# Altium PCB Pwr_Brd_4_PCB.PcbDoc
Units mil, origin at the board's own origin, x right, y up, seen from the top; angles counter-clockwise.
Board outline 4090 x 4010 mil, 2 copper layers (Top Layer, Bottom Layer), stack 61.756 mil thick; 54 components, 18 nets, 126 pads, 22 vias.
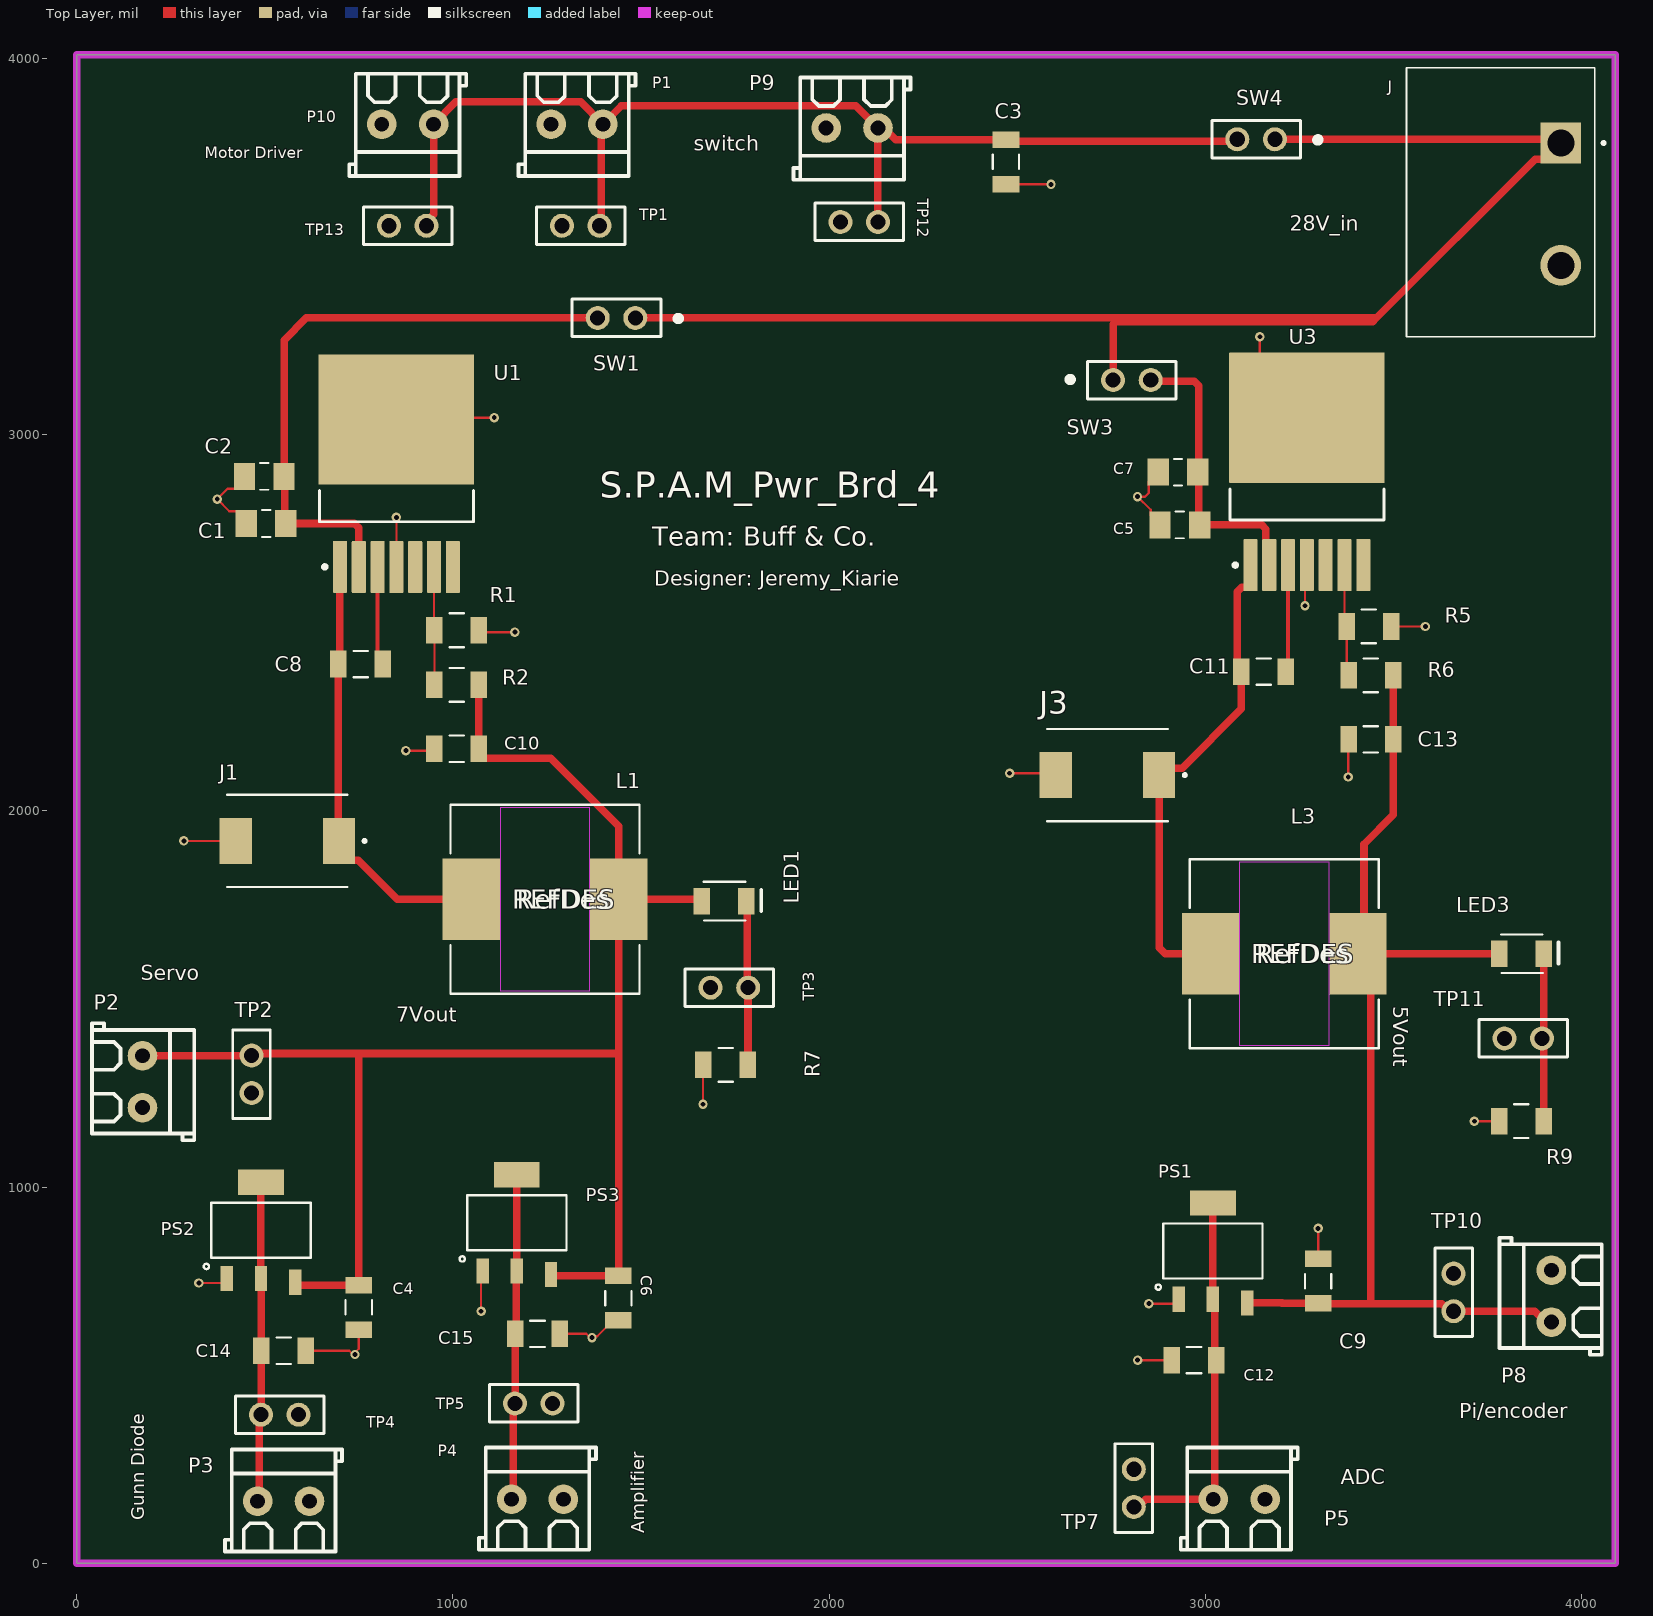
[diagram p0: Top Layer view]
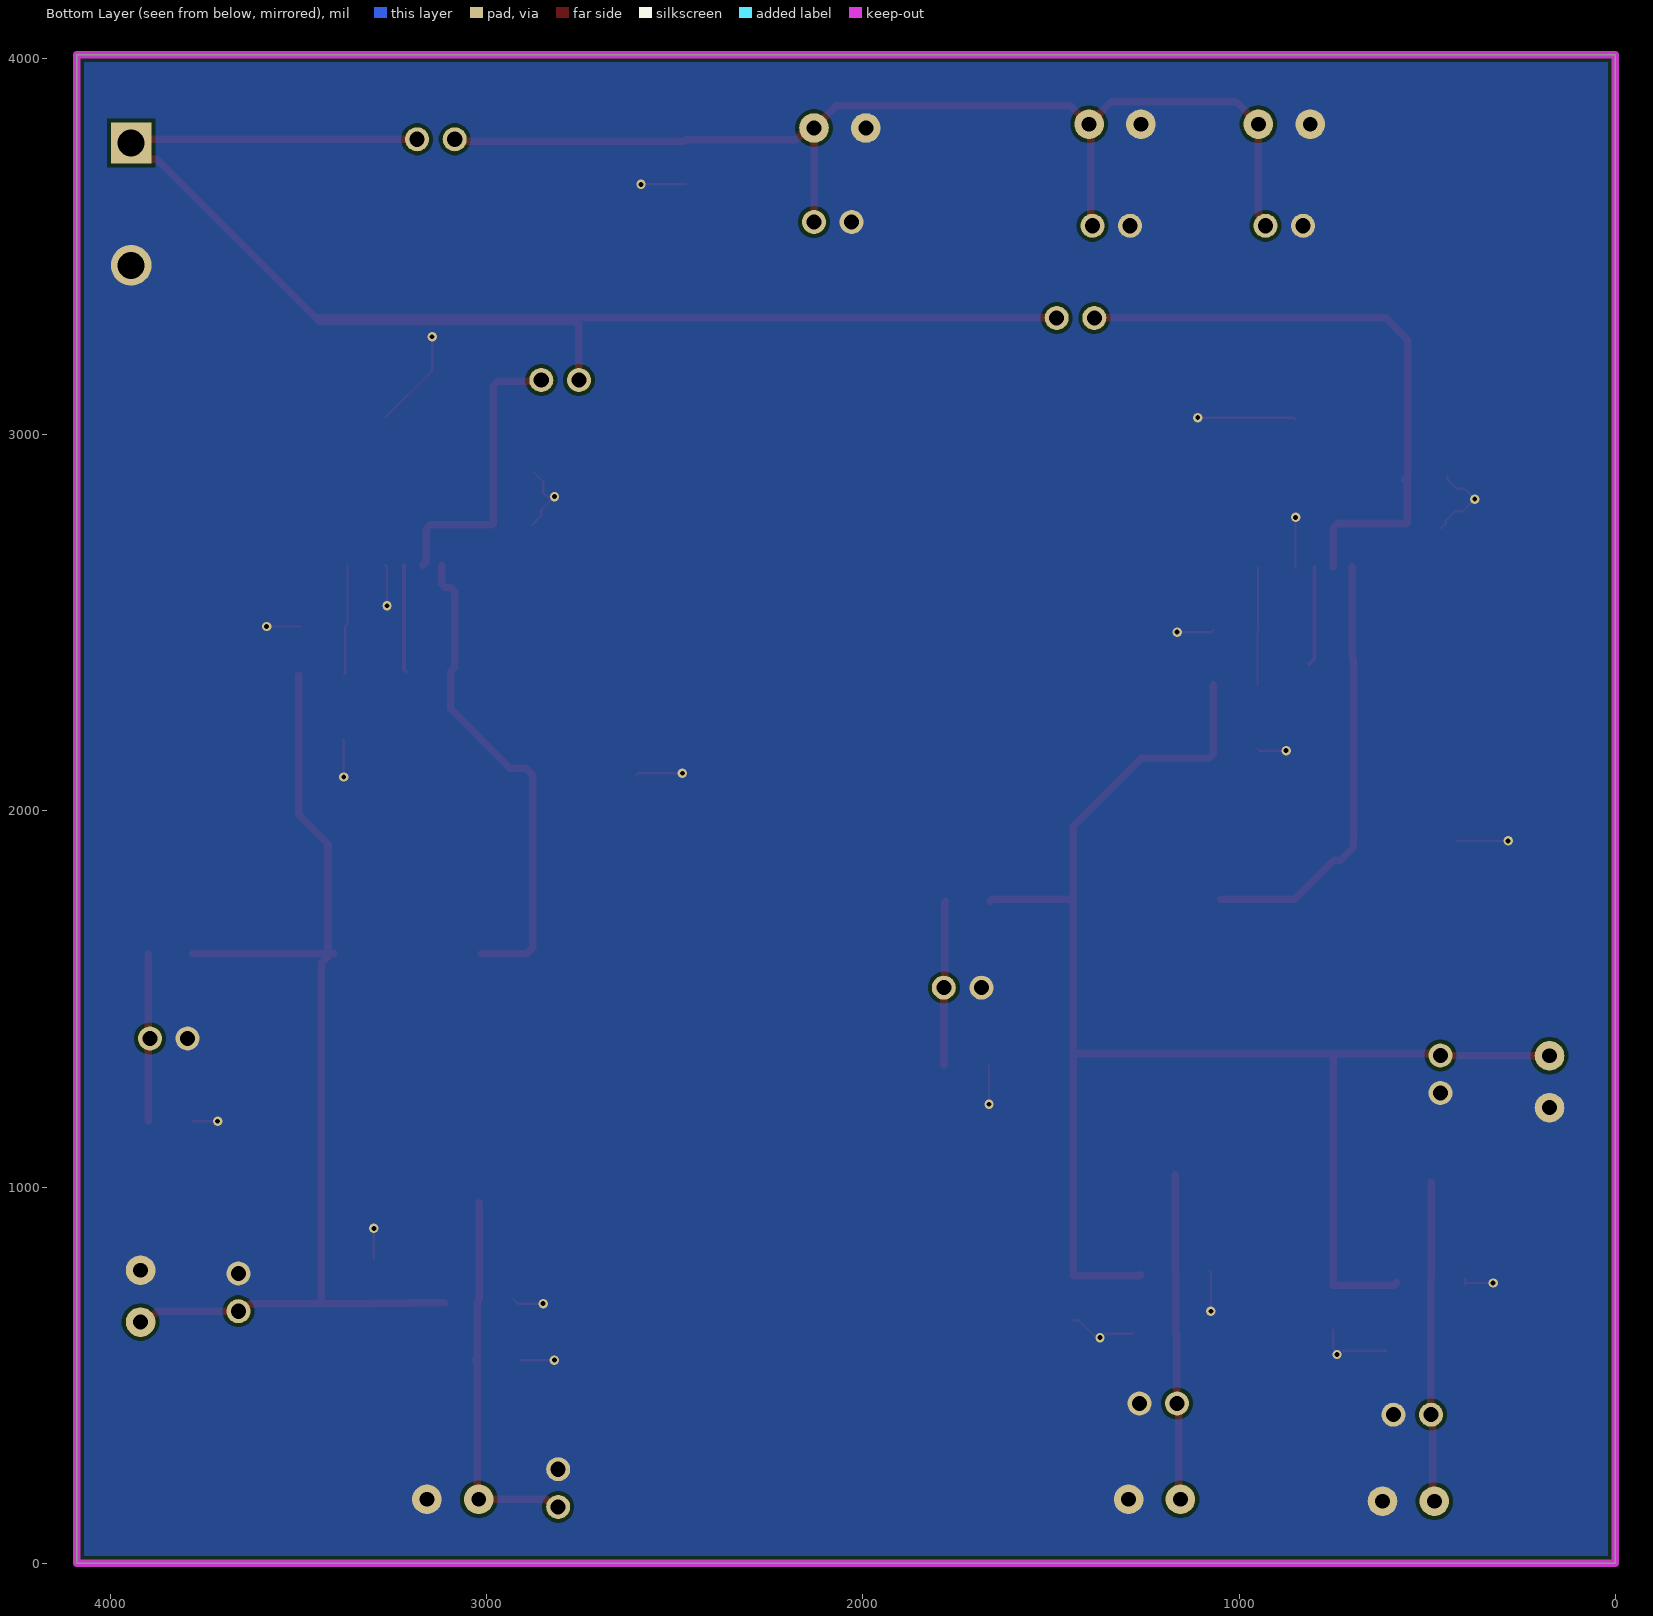
[diagram p1: Bottom Layer view, seen from below]
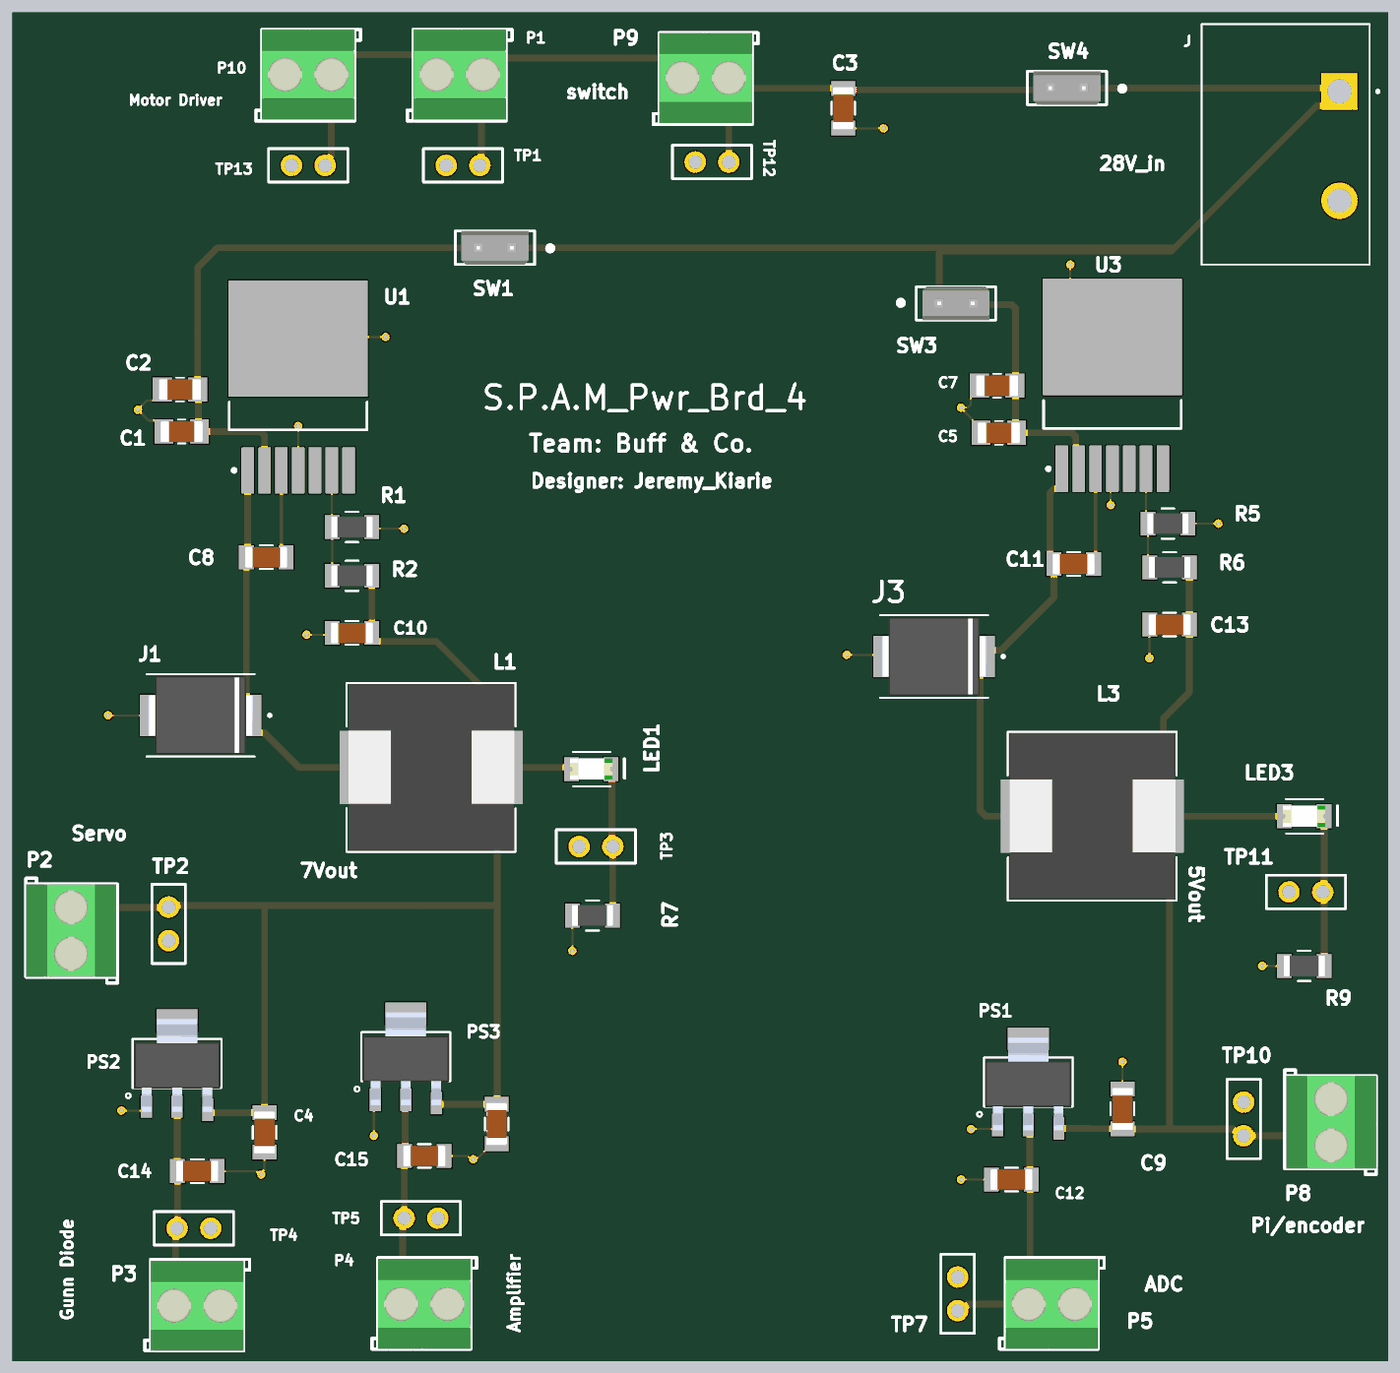
[diagram p2: 3D render of the assembled board from above, using the file's embedded part models]

## Layer stack, top to bottom
Top Solder: solder mask 1, SM-001, Dk 4
Top Layer: signal copper 1.378
Dielectric 1: core 59, Core-043, Dk 4.3
Bottom Layer: signal copper 1.378
Bottom Solder: solder mask 1, SM-001, Dk 4

## Board outline
0,0 4090,0 4090,4010 0,4010

## Design rules (kind name [scope] priority, off if disabled: settings)
Clearance [All] p1: gap=10 ignorepadtopadclearanceinfootprint=FALSE
PlaneClearance [All] p1: clearance=10
PlaneConnect [All] p1: planeconnectstyle=Direct reliefexpansion=20 reliefentries=4 reliefconductorwidth=10 reliefairgap=10
PolygonConnect [All] p1: connectstyle=Direct reliefconductorwidth=10 reliefentries=4 polygonreliefangle="90 Angle" airgapwidth=10
RoutingVias [All] p1: holewidth=13 width=25 viastyle="Through Hole" minholewidth=13 minwidth=25 maxholewidth=60 maxwidth=80
SolderMaskExpansion [All] p1: expansion=4 istentingtop=FALSE
SupplyNets "Schematic Supply Nets" [InNet('GND')] p1: voltage=0.000
UnRoutedNet [All] p1: checkbadconnections=TRUE
Width "Schematic Width Constraint_19" [InNet('NetC4_2')] p1: maxlimit=100 minlimit=10 preferedwidth=20 minimp=50.000000 maximp=50.000000 favimp=50.000000
Width "Schematic Width Constraint_18" [InNet('NetC9_2')] p2: maxlimit=100 minlimit=10 preferedwidth=20 minimp=50.000000 maximp=50.000000 favimp=50.000000
Width "Schematic Width Constraint_17" [InNet('+28V')] p3: maxlimit=100 minlimit=10 preferedwidth=20 minimp=50.000000 maximp=50.000000 favimp=50.000000
Width "Schematic Width Constraint_16" [InNet('NetC12_2')] p4: maxlimit=100 minlimit=10 preferedwidth=20 minimp=50.000000 maximp=50.000000 favimp=50.000000
Width "Schematic Width Constraint_15" [InNet('NetC14_2')] p5: maxlimit=100 minlimit=10 preferedwidth=20 minimp=50.000000 maximp=50.000000 favimp=50.000000
Width "Schematic Width Constraint_14" [InNet('NetC15_2')] p6: maxlimit=100 minlimit=10 preferedwidth=20 minimp=50.000000 maximp=50.000000 favimp=50.000000
Width "Schematic Width Constraint_13" [InNet('NetLED1_2')] p7: maxlimit=100 minlimit=10 preferedwidth=20 minimp=50.000000 maximp=50.000000 favimp=50.000000
Width "Schematic Width Constraint_12" [InNet('NetLED3_2')] p8: maxlimit=100 minlimit=10 preferedwidth=20 minimp=50.000000 maximp=50.000000 favimp=50.000000
Width "Schematic Width Constraint_10" [InNet('NetC11_1')] p9: maxlimit=100 minlimit=10 preferedwidth=20 minimp=50.000000 maximp=50.000000 favimp=50.000000
Width "Schematic Width Constraint_9" [InNet('NetC8_1')] p10: maxlimit=100 minlimit=10 preferedwidth=20 minimp=50.000000 maximp=50.000000 favimp=50.000000
Width "Schematic Width Constraint" [InNet('NetC3_1')] p11: maxlimit=100 minlimit=10 preferedwidth=20 minimp=50.000000 maximp=50.000000 favimp=50.000000
Width "Schematic Width Constraint_2" [InNet('NetC5_2')] p12: maxlimit=100 minlimit=10 preferedwidth=20 minimp=50.000000 maximp=50.000000 favimp=50.000000
Width "Schematic Width Constraint_1" [InNet('NetC1_2')] p13: maxlimit=100 minlimit=10 preferedwidth=20 minimp=50.000000 maximp=50.000000 favimp=50.000000
Width [All] p14: maxlimit=10 minlimit=6 preferedwidth=6 minimp=50.000000 maximp=50.000000 favimp=50.000000
27 further rules are at their usual default settings.

## Components (designator, comment, footprint, x,y, rotation, side; value= is the part's Value field where it differs from the comment)
C1 "C3216X5R1E336M160AC" CAPC3216X180N 503.7,2763.7 r0 top
C2 "C3216X5R1E336M160AC" CAPC3216X180N 498.7,2888.7 r0 top
C3 "22uF" 1206_Passive_Capacitor 2470,3725 r270 top
C4 "10uF" 1206_Passive_Capacitor 750,680 r90 top
C5 "C3216X5R1E336M160AC" CAPC3216X180N 2932.4,2760 r0 top
C6 "10uF" 1206_Passive_Capacitor 1440,705 r90 top
C7 "C3216X5R1E336M160AC" CAPC3216X180N 2927.4,2900 r0 top
C8 "10nF" 1206_Passive_Capacitor 755,2390 r0 top
C9 "10uF" 1206_Passive_Capacitor 3300,750 r270 top
C10 "22uF" 1206_Passive_Capacitor 1010,2165 r0 top
C11 "10nF" 1206_Passive_Capacitor 3155,2370 r0 top
C12 "22uF" 1206_Passive_Capacitor 2970,540 r0 top
C13 "22uF" 1206_Passive_Capacitor 3440,2190 r0 top
C14 "22uF" 1206_Passive_Capacitor 550,565 r180 top
C15 "22uF" 1206_Passive_Capacitor 1225,610 r180 top
J "4DB-P108-02" TE_2-1437667-4 3945,3775 r270 top
J1 "SL44-E3/57T" DIOM7959X262N 560,1920 r180 top
J3 "SL44-E3/57T" DIOM7959X262N 2740,2095 r180 top
L1 "DR127-220-R" DR127 1245,1765 r0 top
L3 "DR127-220-R" DR127 3210,1620 r0 top
LED1 "Red" LED_1206 1721,1760 r0 top
LED3 "Red" LED_1206 3840,1620 r0 top
P1 "2P Screw Terminal Block" "P_Terminal block 3.5mm-pitch" 1330,3825 r180 top
P2 "2P Screw Terminal Block" "P_Terminal block 3.5mm-pitch" 175,1280 r270 top
P3 "2P Screw Terminal Block" "P_Terminal block 3.5mm-pitch" 550,165 r0 top
P4 "2P Screw Terminal Block" "P_Terminal block 3.5mm-pitch" 1225,170 r0 top
P5 "2P Screw Terminal Block" "P_Terminal block 3.5mm-pitch" 3090,170 r0 top
P8 "2P Screw Terminal Block" "P_Terminal block 3.5mm-pitch" 3920,710 r90 top
P9 "2P Screw Terminal Block" "P_Terminal block 3.5mm-pitch" 2061.1,3815 r180 top
P10 "2P Screw Terminal Block" "P_Terminal block 3.5mm-pitch" 880,3825 r180 top
PS1 "AMS1117-3.3" LDO 3020,830 r0 top value="IC REG LINEAR 3.3V 800MA SOT223"
PS2 "AMS1117-5.0" LDO 490,885 r0 top value="IC REG LINEAR 5V 1A SOT223"
PS3 "AMS1117-5.0" LDO 1170,905 r0 top value="IC REG LINEAR 5V 1A SOT223"
R1 "1k" 1206_Passive_Resitor 1010,2480 r0 top value="1K Ohm"
R2 "1K" 1206_Passive_Resitor 1010,2335 r0 top value="4.75K Ohm"
R5 "1k" 1206_Passive_Resitor 3435,2490 r0 top value="1K Ohm"
R6 "1k" 1206_Passive_Resitor 3440,2360 r0 top value="3.16K Ohm"
R7 "1k" 1206_Passive_Resitor 1725,1325 r180 top value="1K Ohm"
R9 "1k" 1206_Passive_Resitor 3840,1175 r180 top value="1K Ohm"
SW1 "SW_2Pin_100mil_Switch" 2Pin-Header-Conn 1485,3310 r180 top
SW3 "SW_2Pin_100mil_Switch" 2Pin-Header-Conn 2755,3145 r0 top
SW4 "SW_2Pin_100mil_Switch" 2Pin-Header-Conn 3185,3785 r180 top
TP1 "10x Probe TP" TP_Diff_Probe 1390,3555 r180 top
TP2 "10x Probe TP" TP_Diff_Probe 465,1350 r270 top
TP3 "10x Probe TP" TP_Diff_Probe 1785,1530 r180 top
TP4 "10x Probe TP" TP_Diff_Probe 490,395 r0 top
TP5 "10x Probe TP" TP_Diff_Probe 1165,425 r0 top
TP7 "10x Probe TP" TP_Diff_Probe 2810,150 r90 top
TP10 "10x Probe TP" TP_Diff_Probe 3660,670 r90 top
TP11 "10x Probe TP" TP_Diff_Probe 3895,1395 r180 top
TP12 "10x Probe TP" TP_Diff_Probe 2130,3565 r180 top
TP13 "10x Probe TP" TP_Diff_Probe 930,3555 r180 top
U1 "LM2678S-ADJ/NOPB" KTW0007B_N 850,2896.3 r90 top
U3 "LM2678S-ADJ/NOPB" KTW0007B_N 3270,2901.3 r90 top

## Footprints (in the part's own frame and the unit in brackets; to place one, negate y for a bottom-side part, rotate by r counter-clockwise, add the part's x,y. Pads: shape width x height; smd on the part's side, far side on the other; paste and mask are expansions set on the pad)
2Pin-Header-Conn [mm]
  round 1.62 hole 1.02: 1(0,0) 2(2.54,0)
  silkscreen extent -3.03,-1.27 4.26,1.26, body extent -1.27,-1.27 3.81,1.27, height 8.13
1206_Passive_Capacitor [mil]
  rect 44x71 smd: 1(-59,0) 2(59,0)
  silkscreen extent -19,-35 19,35, body extent -63,-31 63,32, height 50
1206_Passive_Resitor [mil]
  rect 44x71 smd: 1(-59,0) 2(59,0)
  silkscreen extent -19,-45 19,45, body extent -61,-31 61,31, height 26
CAPC3216X180N [mm]
  rect 1.44x1.82 smd: 1(-1.336,0) 2(1.336,0)
  silkscreen extent -0.29,-0.9 0.29,0.9, body extent -1.6,-0.8 1.6,0.8, height 1.8
DIOM7959X262N [mm]
  rect 2.18x3.12 smd: A(3.485,0) C(-3.485,0)
  silkscreen extent -5.32,-3.11 4.07,3.11, body extent -3.97,-2.96 3.97,2.96, height 2.62
DR127 [mil]
  rect 152x217 smd paste+0 mask+0: 1(-196,0) 2(196,0)
  Top Layer keep-out region: -118,-244 -118,244 118,244 118,-244
  silkscreen extent -251,-251 251,251, body extent -245,-245 247,247, height 315
KTW0007B_N [mm] "DPAK, 7-Leads, Body 9.4x10.4mm, Pitch 1.27mm, IPC Medium Density"
  rrect11% 3.5x0.95 smd: 1(-6.3,3.81) 2(-6.3,2.54) 3(-6.3,1.27) 4(-6.3,0) 5(-6.3,-1.27) 6(-6.3,-2.54) 7(-6.3,-3.81)
  rrect1% 8.8x10.5 smd: 8(3.65,0)
  silkscreen extent -6.42,-5.2 -1.15,5.2, body extent -3.25,-5.2 6.15,5.2, height 4.65
LDO [mm]
  rect 0.838x1.7 smd: 1(-2.311,-3.25) 2(0,-3.25) 3(2.311,-3.5)
  rect 3.099x1.7 smd: 4(0,3.25)
  silkscreen extent -3.86,-2.62 3.35,1.85, body extent -3.25,-3.65 3.25,3.35, height 1.85
LED_1206 [mil]
  rect 44x71 smd: 1(-59,0) 2(59,0)
  silkscreen extent -54,-51 99,51, body extent -63,-31 63,31, height 28
"P_Terminal block 3.5mm-pitch" [mm]
  round 2 hole 1: 1(-1.75,0) 2(1.75,0)
  silkscreen extent -3.95,-3.4 3.95,3.5, body extent -3.5,-3.4 3.5,3.4, height 8.4
TE_2-1437667-4 [mil]
  rect 108x108 hole 72: 1(0,0)
  round 108 hole 72: 2(325,0)
  silkscreen extent -200,-410 515,118
TP_Diff_Probe [mm]
  round 1.62 hole 1.02: 1(0,0) 2(2.54,0)
  silkscreen extent -1.72,-1.27 4.26,1.26

## Part data
C1 C2 C5 C7: "Cap Ceramic 33uF 25V X5R 20% Pad SMD 1206 85Â°C Low ESR T/R", Package="3216 TDK", Check_prices=https://www.snapeda.com/parts/C3216X5R1E336M160AC/TDK/view-part/?ref=eda, MF="TDK Electronics", MP=C3216X5R1E336M160AC, SnapEDA_Link=https://www.snapeda.com/parts/C3216X5R1E336M160AC/TDK/view-part/?ref=snap
C3 C10 C12 C13 C14 C15: library part C_22uF_1206, "22uF ±10% 25V X5R 1206 Multilayer Ceramic Capacitors MLCC - SMD/SMT RoHS", LCSC Part#=C12891, MFR Part #=CL31A226KAHNNNE, Datasheet=https://datasheet.lcsc.com/lcsc/1811031514_Samsung-Electro-Mechanics-CL31A226KAHNNNE_C12891.pdf, Type=basic
C4 C6 C9: library part C_10uF_1206, "10uF ±10% 50V X5R 1206 Multilayer Ceramic Capacitors MLCC - SMD/SMT RoHS", LCSC Part#=C13585, MFR Part #=CL31A106KBHNNNE, Datasheet=https://datasheet.lcsc.com/lcsc/1810221112_Samsung-Electro-Mechanics-CL31A106KBHNNNE_C13585.pdf, Type=Basic
C8 C11: library part C_10nF_1206, "10nF 50V X7R ±10% 1206 Multilayer Ceramic Capacitors MLCC - SMD/SMT ROHS", LCSC Part#=C1848, MFR Part #=CL31B105KBHNNNE, Digikey Link=https://www.digikey.com/product-detail/en/C1206C105M4RACTU/399-8150-1-ND/3471873/?itemSeq=304982366, Type=Basic
J: "Conn; Term Strip; Barrier; 2Pole; 8.26mmPitch; SnglRow; 22-12; Series 4DB; 20A; 150V", Package=None, Availability=Unavailable, MF="TE Connectivity", MP=4DB-P108-02, Price=None, SnapEDA_Link=https://www.snapeda.com/parts/4DB-P108-02/TE%20Connectivity%20AMP%20Connectors/view-part/2743721/?ref=snap, TE_purchase_URL=https://www.te.com/usa-en/product-2-1437667-4.html?te_bu=Cor&te_type=disp&te_campaign=seda_glo_cor-seda-global-disp-prtnr-fy19-seda-model-bom-cta_sma-317_1&elqCampaignId=32493
J1 J3: "Diode Schottky 40 V 4A Surface Mount DO-214AB (SMC)", Package="DO-214 Vishay", Check_prices=https://www.snapeda.com/parts/SL44-E3/57T/Vishay/view-part/?ref=eda, MF="Vishay Semiconductor", MP=SL44-E3/57T, SnapEDA_Link=https://www.snapeda.com/parts/SL44-E3/57T/Vishay/view-part/?ref=snap
L1 L3: "Description", Manufacturer_Name=Eaton, Copyright="Copyright (C) 2025 Ultra Librarian. All rights reserved.", Manufacturer_Part_Number=DR127-220-R
LED1 LED3: library part LED_RED_1206, "Red 621~631nm 1206 Light Emitting Diodes (LED) RoHS", LCSC Part#=C93133, MFR Part #=15-21/R6C-FQ1R1B/2T, Datasheet=https://datasheet.lcsc.com/szlcsc/1811151241_Everlight-Elec-15-21-R6C-FQ1R1B-2T_C93133.pdf, Type=Extended
P1 P2 P3 P4 P5 P8 P9 P10: library part "P_Terminal block", "Green Straight pin 3.5mm  pitch; P=3.5mm  Screw terminal ROHS", LCSC Part#=C474892, Manufacturer="Cixi Kefa Elec", MFR Part #=KF350-3.5-2P, Datasheet=https://datasheet.lcsc.com/lcsc/2001160007_Cixi-Kefa-Elec-KF350-3-5-2P_C474892.pdf
PS1: library part PS_AMS_LDO_3v3, "LOW DROPOUT REGULATORS(LDO) POSITIVE FIXED 1.3V @ 800MA 15V 3.3V 1A SOT-223 ROHS", LCSC Part#=C6186, MFR Part #=AMS1117-3.3, Type=Basic
PS2 PS3: library part PS_AMS_LDO_5V, "LOW DROPOUT REGULATORS(LDO) POSITIVE FIXED 1.3V @ 1A 15V 5V 1A SOT-223 ROHS", LCSC Part#=C6187, MFR Part #=AMS1117-5.0, Type=Basic
R1 R2 R5 R6 R7 R9: library part R_1K_1206, "CHIP RESISTOR - SURFACE MOUNT 1KOHMS ±1% 1/4W 1206 ROHS", LCSC Part#=C4410, MFR Part #=RNCP1206FTD1K00CT, Digikey Link=https://www.digikey.com/product-detail/en/RNCP1206FTD1K00/RNCP1206FTD1K00CT-ND/2240675/?itemSeq=304982373, Type=Basic
SW1 SW3 SW4: "2Pin Header", LCSC Part#=C124375, Type=Extended
TP1 TP2 TP3 TP4 TP5 TP7 TP10 TP11 TP12 TP13: library part TP_Diff_Probe, "Test Point 300 mil centers"
U1 U3: library part CMP-0069-00191-3, "SIMPLE SWITCHER® High Efficiency 5A Step-Down Voltage Regulator, 7-pin TO-263, Pb-Free", Manufacturer="Texas Instruments", PackageTopMarking=NSUZXYTTE#*LM2678*S-ADJ, PowerWise=N, Code_JEDEC=MO-169-AC, ComponentLink1Description="Datasheet URL", ComponentLink1URL=http://www.ti.com/general/docs/lit/getliterature.tsp?genericPartNumber=LM2678&fileType=pdf, CompType=Switcher, PackageDescription="TO-263, Molded, .400 x .390 x .180in Body, 7 Lead, .050in Pitch, Surface Mount", PackageReference=KTW0007B, PinCount=7, RoHS=Y

## Via types
v1: diameter 25, hole 13, Top Layer to Bottom Layer, 22 vias

## Nets (pads, with @x,y where several pads share a name; then routed paths per layer and width w, separated by ;. In a path a pad name is that pad's centre, name@x,y a point inside that pad or via, vN(x,y) a via of type N, cw(c..) or ccw(c..) an arc to the next point about the centre after c; other vN are vias at no path point)
+28V: J.1 SW1.1 SW3.1 SW4.1 | length 4285.9
  Top Layer w20: SW1.1 1545.32,3310 3455,3310 ; SW3.1 2755,3293.28 2761.72,3300 3445,3300 3455,3310 ; SW4.1 3935,3785 J.1 3920,3775 3920,3751.29 3901,3732.29 3877.29,3732.29 3455,3310
GND: C1.1 C2.1 C3.2 C4.1 C5.1 C6.1 C7.1 C9.1 C10.1 C12.1 C13.1 C14.1 C15.1 J1.A J3.A J.2 P1.2 P2.2 P3.2 P4.2 P5.2 P8.2 P9.2 P10.2 PS1.1 PS2.1 PS3.1 R1.2 R5.2 R7.2 R9.2 TP1.2 TP2.2 TP3.2 TP4.2 TP5.2 TP7.2 TP10.2 TP11.2 TP12.2 TP13.2 U1.4 U1.8 U3.4 U3.8 | length 2962.8
  Top Layer w6: v1(285,1920) J1.A ; v1(325,745) 394.08,745 399,740.08 PS2.1 ; C2.1 446.1,2881.22 420.76,2855.87 400.87,2855.87 v1(373.7,2828.7) 405.87,2796.53 425.76,2796.53 451.1,2771.18 C1.1 C1.1@463.7,2751.1 ; C14.1 724.86,565 734.86,555 v1(740,555) 740,560.14 750,570.14 C4.1 ; U1.4 v1(850,2780) ; U1.8 855,3045 v1(1110,3045) ; v1(875,2160) 946,2160 C10.1 ; R1.2 1074,2475 v1(1165,2475) ; v1(1075,670) 1075,773.05 PS3.1 ; C15.1 1354.86,610 1364.86,600 v1(1370,600) 1373.64,603.64 1384.14,603.64 1426.5,646 C6.1 ; v1(1665,1220) 1665,1324 R7.2 ; C3.2 2470.64,3665.36 v1@2589.36,3665.36 ; v1(2480,2100) 2597.8,2100 J3.A ; v1@2589.36,3664.36 v1(2590,3665) ; v1(2820,540) C12.1 ; v1(2850,690) 2916.95,690 PS1.1 ; C7.1 2849.46,2874.65 2849.46,2844.65 2839.8,2835 v1(2819.8,2835) 2854.85,2799.95 2854.85,2784.95 C5.1 ; v1(3145,3260) 3145,3170 U3.8 ; v1(3265,2545) 3265,2648.27 U3.4 ; C9.1 v1(3300,890) ; v1(3380,2090) 3380,2189 C13.1 ; R5.2 v1(3585,2490) ; v1(3715,1175) R9.2
NetC1_2: C1.2 C2.2 SW1.2 U1.2 | length 1658.7
  Top Layer w20: C2.2@560,2880 C2.2@553.8,2886.2 ; U1.2 750,2751.99 738.28,2763.7 C1.2 553.8,2766.2 C2.2@553.8,2886.2 ; SW1.2 610,3310 551.3,3251.3 C2.2 C2.2@553.8,2886.2
NetC3_1: C3.1 P1.1 P9.1 P10.1 SW4.2 TP1.1 TP12.1 TP13.1 | length 3046.5
  Top Layer w20: TP13.1 930,3566.85 948.9,3585.74 P10.1 1008.27,3884.37 1339.53,3884.37 P1.1 ; TP1.1 1394.45,3559.45 1394.45,3820.55 P1.1 ; TP12.1 P9.1 ; SW4.2@3085,3779.5 2474.5,3779.5 C3.1 2176.89,3784 2145.89,3815 P9.1 ; P1.1 1448.27,3874.37 2070.63,3874.37 P9.1
NetC4_2: C4.2 C6.2 C10.2 L1.2 LED1.1 P2.1 PS2.3 PS3.3 R2.2 TP2.1 | length 4290.6
  Top Layer w20: P2.1 TP2.1@463.9,1348.9 ; TP2.1 470,1355 750,1355 ; PS2.3 581,745.5 587.5,739 C4.2 750,1355 ; R2.2 C10.2 1069,2151.5 1081,2139.5 1260.78,2139.5 1441,1959.28 L1.2 ; PS3.3 1264.2,764 C6.2 1441,765 1441,1355 ; LED1.1 1657,1765 L1.2 ; 750,1355 1441,1355 ; 1441,1355 L1.2
NetC5_2: C5.2 C7.2 SW3.2 U3.2 | length 784.2
  Top Layer w20: SW3.2 2858.76,3141.24 2970.78,3141.24 2982.5,3129.52 2982.5,2900 2982.5,2762.5 C5.2 3149.58,2760 3161.3,2748.28 3161.3,2661.97 U3.2
NetC8_1: C8.1 J1.C L1.1 U1.1 | length 1146.7
  Top Layer w20: J1.C 697.2,1901.5 730.12,1868.58 748.62,1868.58 852.2,1765 L1.1 ; J1.C@697.2,1929.25 696,1930.46 C8.1 700,2415.5 U1.1
NetC8_2: C8.2 U1.3 | length 264.1
  Top Layer w10: U1.3 800,2404 C8.2
NetC9_2: C9.2 C13.2 L3.2 LED3.1 P8.1 PS1.3 R6.2 TP10.1 | length 2915.9
  Top Layer w20: PS1.3 3204.04,692.2 3202.83,691 C9.2 3301,690 3440,690 ; L3.2 L3.2@3415,1620 ; L3.2@3421.78,1620 LED3.1 ; R6.2 C13.2 3499,1989 3421.78,1911.78 3421.78,1626.78 L3.2@3415,1620 ; P8.1 3904.1,641.1 3875.21,670 TP10.1 3648.15,670 3628.15,690 3440,690 ; L3.2@3415,1620 3440,1595 3440,690
NetC11_1: C11.1 J3.C L3.1 U3.1 | length 1304.1
  Top Layer w20: L3.1 2893.03,1620 2877.2,1635.82 J3.C 2895.61,2113.4 2938.4,2113.4 3096,2271 C11.1 3085,2381 3085,2582.65 3096.72,2594.37 3111.3,2594.37 3120,2603.07 U3.1
NetC11_2: C11.2 U3.3 | length 285.8
  Top Layer w10: C11.2 3220,2376 U3.3
NetC12_2: C12.2 P5.1 PS1.2 PS1.4 TP7.1 | length 1014.3
  Top Layer w20: TP7.1 2821.85,150 2841.85,170 P5.1 3025.05,173.95 3025.05,536.05 C12.2 3024.5,544.5 3024.5,697.55 PS1.2 PS1.4
NetC14_2: C14.2 P3.1 PS2.2 PS2.4 TP4.1 | length 865.4
  Top Layer w20: P3.1 485.55,169.45 485.55,390.55 TP4.1 TP4.1@483.05,388.05 ; PS2.4 PS2.2 490.5,756.55 490.5,565.5 C14.2 TP4.1@491,391.53
NetC15_2: C15.2 P4.1 PS3.2 PS3.4 TP5.1 | length 868.7
  Top Layer w20: P4.1 1160.55,174.45 1160.55,420.55 TP5.1 1165.5,425.5 1165.5,609.5 C15.2 1168,612 1168,775.05 PS3.2 PS3.4
NetLED1_2: LED1.2 R7.1 TP3.1 | length 437.5
  Top Layer w20: LED1.2 1782.5,1757.5 1782.5,1532.5 TP3.1 1784.5,1529.5 1784.5,1325.5 R7.1
NetLED3_2: LED3.2 R9.1 TP11.1 | length 436.5
  Top Layer w20: TP11.1@3895,1383.15 3899,1379.15 R9.1 ; TP11.1 3899,1399 LED3.2
NetR1_1: R1.1 R2.1 U1.6 | length 313.7
  Top Layer w6: U1.6 950,2481 R1.1 R2.1
NetR5_1: R5.1 R6.1 U3.6 | length 296
  Top Layer w6: U3.6@3369.9,2653.17 3369.9,2496.1 R5.1 3376,2365 R6.1@3379.77,2361.23
pads on no net: U1.5 U1.7 U3.5 U3.7

## Polygon pours and split planes (outlines as drawn)
GND on Bottom Layer "GND_L02_P000" (solid, pour order 0): 0,4010 4085,4010 4085,0 0,0

## Keep-outs
Keep-Out Layer:
  lines w20: 0,0 0,3900 0,4010 790,4010 1070,4010 1200,4010 3389,4010 4090,4010 4090,0 0,0

## Silkscreen, mask and mechanical layers (free items; w line width, h text height)
Top Overlay:
  text "switch" at 1640,3755 h40
  text "Motor Driver" at 340,3735 h30
  text "28V_in" at 3225,3541.66 h40
  text "S.P.A.M_Pwr_Brd_4" at 1390,2831.66 h70
  text "Team: Buff & Co." at 1530,2705 h50
  text "Designer: Jeremy_Kiarie" at 1535,2598.33 h40
  text "Servo" at 170,1550 h40
  text "5Vout" at 3500,1480 h40 r270
  text "7Vout" at 850,1440 h40
  text "Pi/encoder" at 3675,385 h40
  text "ADC" at 3360,210 h40
  text "Gunn Diode" at 180,115 h35 r90
  text "Amplifier" at 1508.34,80 h35 r90

## Text inside footprints (layer, text, board x,y; h text height)
L1: Top Overlay "REFDES" at 1157.5,1740 h50; Top Overlay "RefDes" at 1170,1740 h50; Mechanical 13 "RefDes2" at 1157.5,1740 h50
L3: Top Overlay "RefDes" at 3135,1595 h50; Top Overlay "REFDES" at 3122.5,1595 h50; Mechanical 13 "RefDes2" at 3122.5,1595 h50